# EAGLE board inverted-f_with_mmcx (EAGLE 6.5.0)
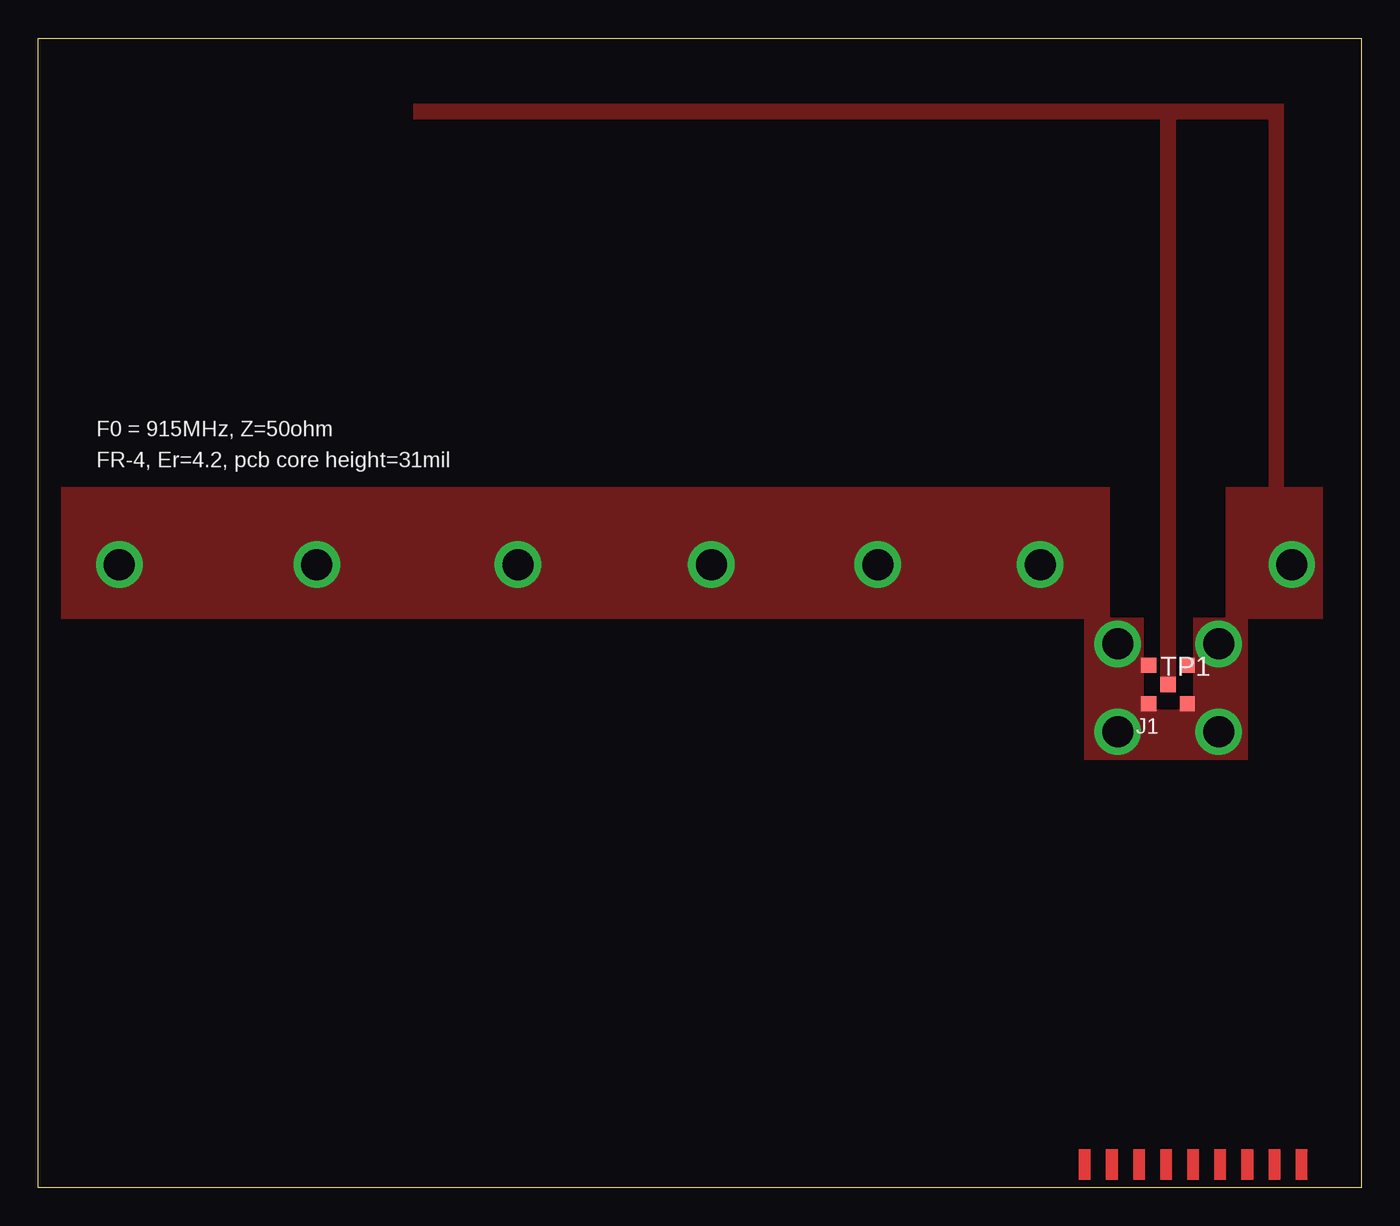
[diagram p0: board, top side]
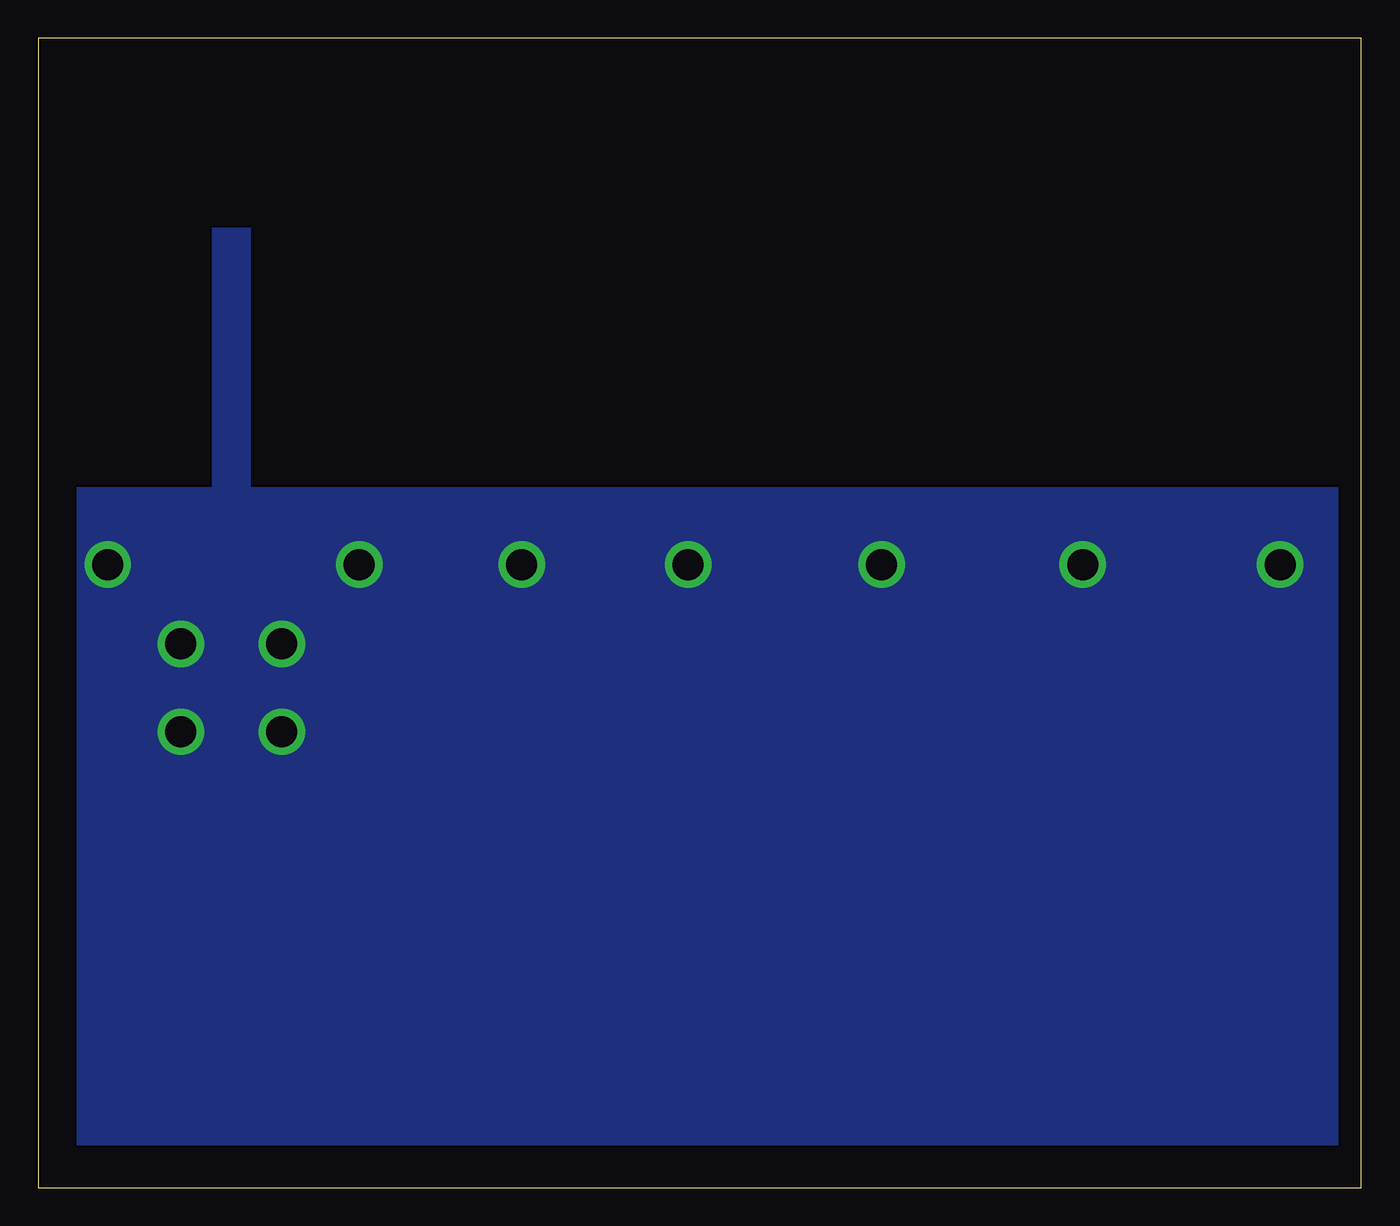
[diagram p1: board, bottom side, seen from below]

Size 86.87 x 75.44 mm. Coordinates in mm from the lower left corner, seen from the top.
Outline: 0,75.44 86.87,75.44 86.87,0 0,0 0,75.44
Copper layers (1*16): Top 0.035mm / dielectric 0.8mm / Bottom 0.035mm
Design rules "default *": minimum track width 10mil, minimum drill 24mil, track to track 8mil, track to pad 8mil, pad to pad 8mil, via to via 8mil, smd to smd 8mil, copper to edge 10mil, drill to drill 8mil, minimum pad ring 10mil, minimum via ring 8mil, stop-mask expansion 4mil, vias tented up to drill 0mil, thermal gap 10mil

## Footprints (pad centres in the part's own frame; a part is rotated, then mirrored left to right if it is on the bottom)
MMCX-J-P-X-RA-SM1_SAMTEC = smd 1 x 1: GND@1 -1.27,1.27; GND@2 1.27,1.27; GND@3 1.27,-1.27; GND@4 -1.27,-1.27 | smd 1.016 x 1.016: SIG 0,0
TP10SQ = smd 1.016 x 1.016: TP 0,0

## Placement (x,y rotation side)
J1  MMCX-J-P-X-RA-SM1SMD  [MMCX-J-P-X-RA-SM1_SAMTEC]  74.17,33.02 0 top
TP1  TPTP10SQ  [TP10SQ]  74.17,33.02 0 top

## Library data of the parts
J1 = 195Ec_300-0004-01_rev1_b
TP1 = testpad

## Nets
GND: J1.GND@1 J1.GND@2 J1.GND@3 J1.GND@4 J1.SIG TP1.TP

## Tracks (layer width: path | path; a pad name or v marks a point on that pad's centre or on a via)
GND  (via drill 2.03 pad 2.54)
  other vias: 82.3,40.89 65.79,40.89 44.2,40.89 18.29,40.89 31.5,40.89 55.12,40.89 5.33,40.89 70.87,29.92 70.87,35.69 77.5,35.69 77.5,29.92
  pour Top (no thermals): 75.82,37.41 79.4,37.41 79.4,28.09 68.68,28.09 68.68,37.41 72.54,37.41 72.57,31.37 75.84,31.37 75.82,37.39
  pour Bottom (no thermals): 1.52,45.97 84.33,45.97 84.33,2.79 1.52,2.79
  pour Top (no thermals): 74.68,70.36 74.68,33.5 73.66,33.5 73.66,70.36
  pour Top (no thermals): 1.52,45.97 70.36,45.97 70.36,37.34 1.52,37.34
  pour Top (no thermals): 77.98,45.97 84.33,45.97 84.33,37.34 77.98,37.34
  pour Top (no thermals): 80.77,45.47 80.77,70.1 24.64,70.1 24.64,71.12 81.79,71.12 81.79,45.47
N$1
  pour Bottom (no thermals): 72.9,62.99 75.44,62.99 75.44,44.7 72.9,44.7
(copper drawn outside any net)
  shapes: Top area x9

## Text on the board
tPlace: F0 = 915MHz, Z=50ohm | FR-4, Er=4.2, pcb core height=31mil